# Altium PCB Sterilise.PcbDoc
Units mil, origin at the board's own origin, x right, y up, seen from the top; angles counter-clockwise.
Board outline 1878.4 x 1473.4 mil, 2 copper layers (Top Layer, Bottom Layer); 9 components, 0 nets, 27 pads, 3 vias.
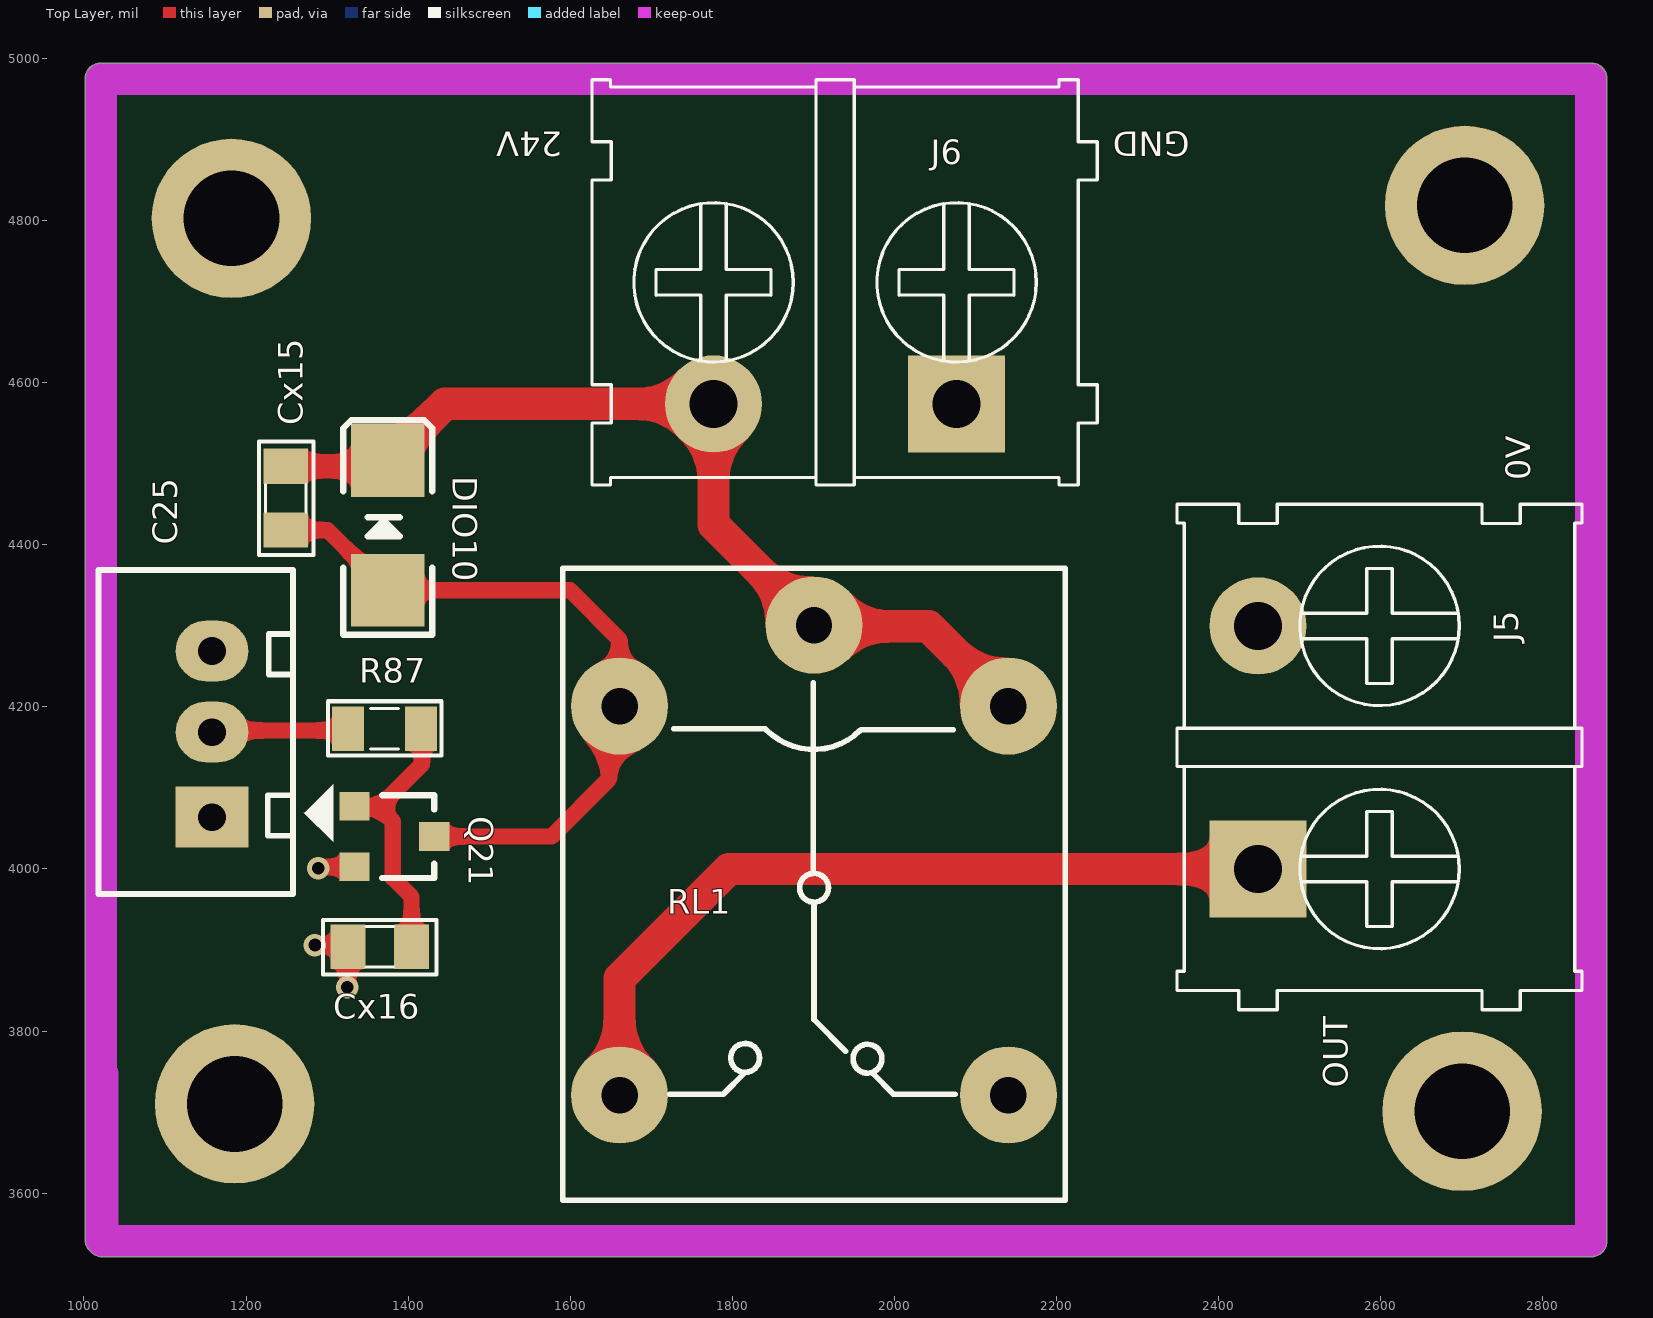
[diagram p0: Top Layer view]
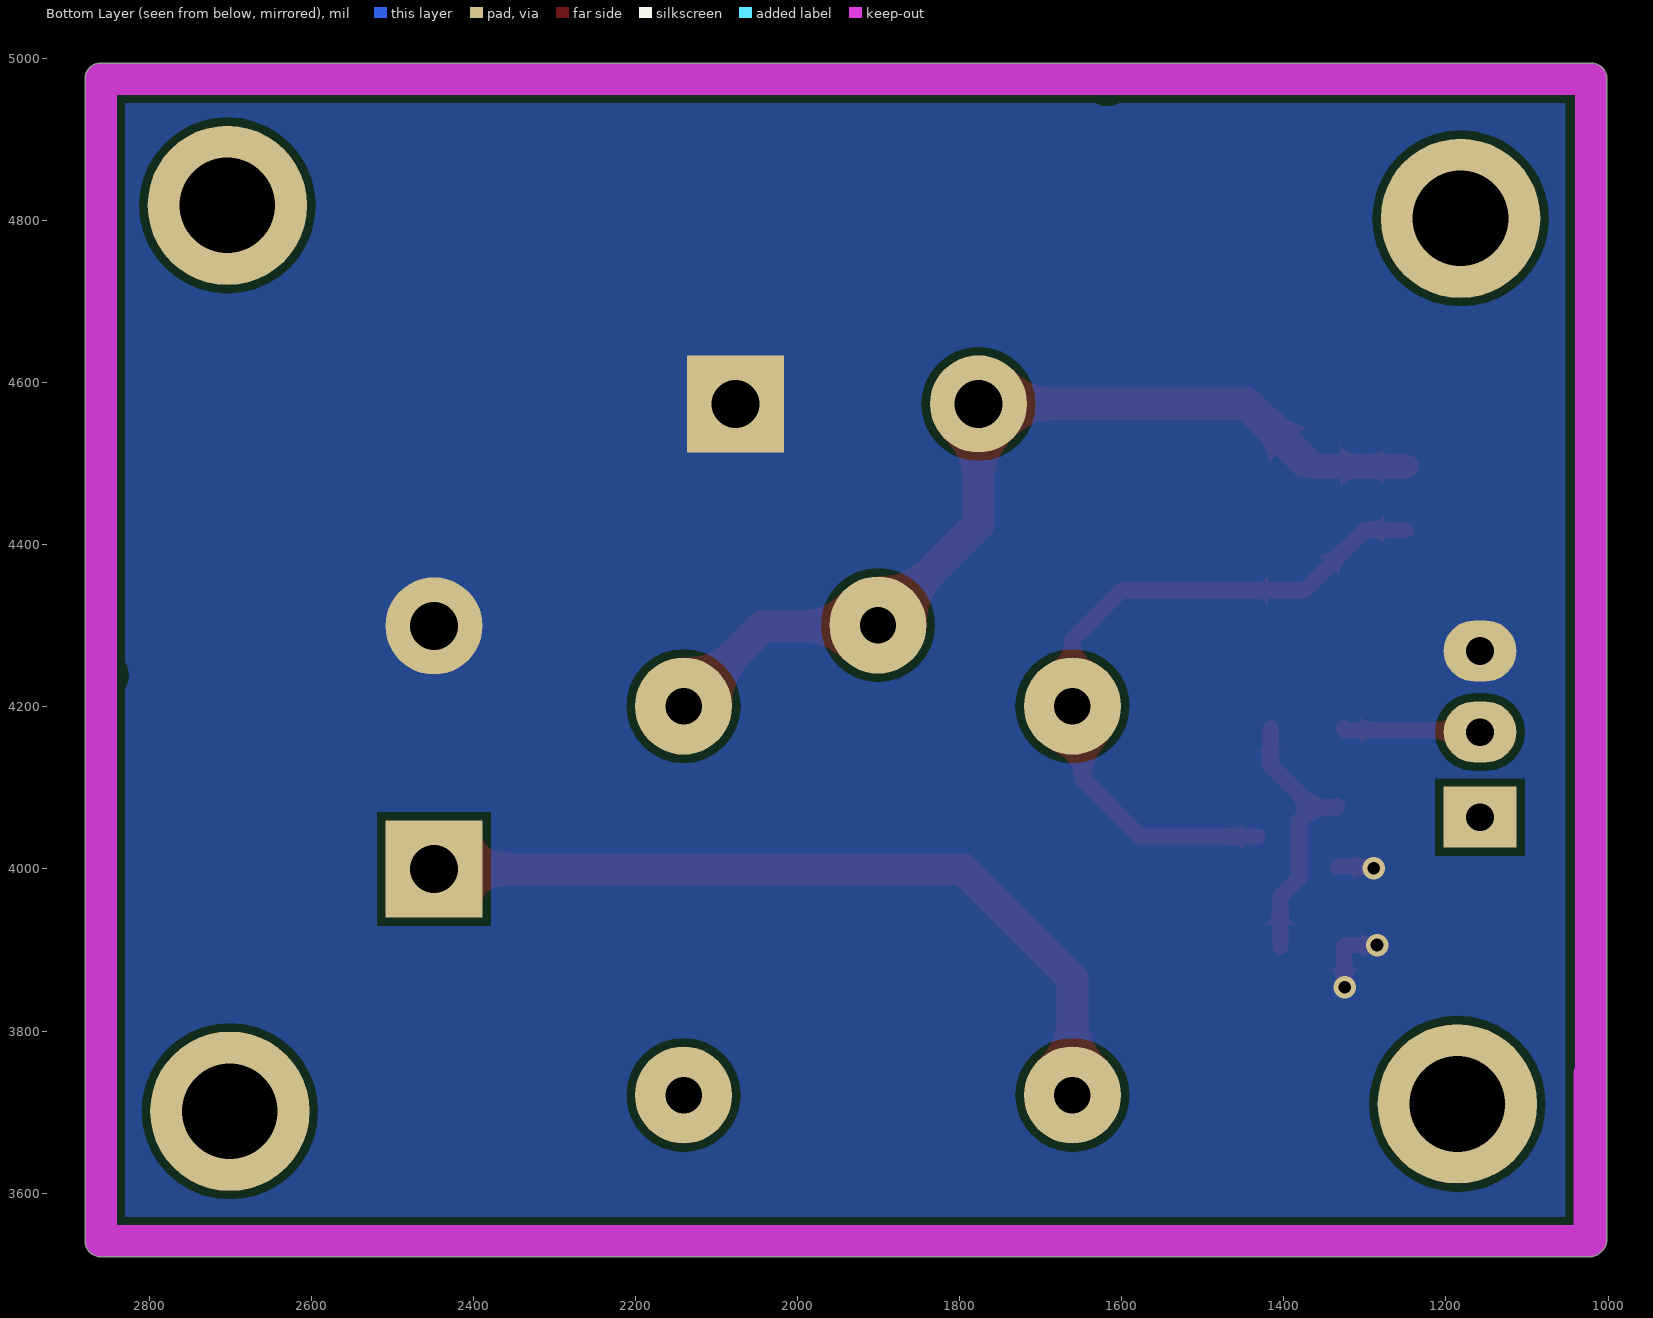
[diagram p1: Bottom Layer view, seen from below]

## Layer stack, top to bottom
Top Solder: solder mask 0.4, Solder Resist, Dk 3.5
Top Layer: signal copper 1.4
Dielectric 1: dielectric 12.6, FR-4, Dk 4.8
Bottom Layer: signal copper 1.4
Bottom Solder: solder mask 0.4, Solder Resist, Dk 3.5

## Board outline
1008.11,3528.11 cw(c1021,3543) 1001.3,3543 1001.3,4975 cw(c1021,4975) 1021,4994.7 2860,4994.7 cw(c2860,4975) 2879.7,4975 2879.7,3541 cw(c2860,3541) 2860,3521.3 1023,3521.3 cw(c1023,3541)

## Design rules (kind name [scope] priority, off if disabled: settings)
Clearance [All] p1: gap=10 ignorepadtopadclearanceinfootprint=FALSE
PlaneConnect [All] p1: planeconnectstyle=Direct reliefexpansion=20 reliefentries=4 reliefconductorwidth=10 reliefairgap=10
PolygonConnect [All] p1: connectstyle=Direct reliefconductorwidth=10 reliefentries=4 polygonreliefangle="90 Angle" airgapwidth=10
RoutingVias [All] p1: holewidth=28 width=50 viastyle="Through Hole" minholewidth=28 minwidth=50 maxholewidth=28 maxwidth=50
SolderMaskExpansion [All] p1: expansion=4 istentingtop=FALSE
Width [All] p1: maxlimit=30 minlimit=10 preferedwidth=20
29 further rules are at their usual default settings.

## Components (designator, comment, footprint, x,y, rotation, side; value= is the part's Value field where it differs from the comment)
C25 "Header3" Header3 1158,4069 r90 top
Cx15 "104" CN-SMD-0805 1249.01,4457.63 r90 top value=33pF
Cx16 "104" CN-SMD-0805 1365,3904 r0 top value=33pF
DIO10 "Diode SMD" DIO-SMD-106 1375,4424 r270 top value=1N5007
J5 "KF2" KF2-7.62 2599,4150 r90 top
J6 "KF2" KF2-7.62 1927,4724 r180 top
Q21 "2SC1815" SOT23-321 1383,4040 r270 top value=C1815
R87 "470" RES-SMD-0805 1371,4173 r180 top
RL1 "Relay 10A/12V" "RELAY 5" 1901,3976 r270 top value="Relay SPDT, 10A, 12V"

## Footprints (in the part's own frame and the unit in brackets; to place one, negate y for a bottom-side part, rotate by r counter-clockwise, add the part's x,y. Pads: shape width x height; smd on the part's side, far side on the other; paste and mask are expansions set on the pad)
CN-SMD-0805 [mil]
  rect 43.31x55 smd paste+0 mask-55: 1(-39.36,0.01) 2(39.37,0.01)
  silkscreen extent -70,-34 70,33, body extent -39,-25 39,25, height 31
DIO-SMD-106 [mil]
  rect 90x90.55 smd paste+0 mask-90.55: 1(80,0) 2(-80,0)
  silkscreen extent -130,-55 135,55, body extent -99,-50 106,52, height 95
Header3 [mil] "CON 3"
  rect 75x90 hole 34 paste+0 mask-90: 1(-5,0)
  oval 75x90 hole 34 paste+0 mask-90: 2(100,0) 3(200,0)
  silkscreen extent -100,-150 300,140, body extent -95,-90 295,136, height 276
KF2-7.62 [mil]
  rect 120x120 hole 59.06 paste+0 mask-120: 1(-150,150)
  round 120 hole 59.06 paste+0 mask-120: 2(150,150)
  silkscreen extent -324,-250 300,250, body extent -300,-241 300,231, height 337
"RELAY 5" [mil] "Reley DPDT, 8 pin, 1A, W400mil, L800mil,H 300mil"
  round 120 hole 45 paste+0 mask-120: 1(-325,0) 2(255,240) 3(255,-240) 4(-225,-240) 5(-225,240)
  silkscreen extent -395,-310 385,310, body extent -371,-304 381,306, height 602
RES-SMD-0805 [mil]
  rect 39.37x55 smd paste+0 mask-55: 1(-45,0) 2(45,0)
  silkscreen extent -70,-34 70,33, body extent -39,-25 39,25, height 31
SOT23-321 [mm]
  rect 0.9x0.95 smd mask+0: 1(0.95,-1.25)
  rect 0.9x0.95 smd: 2(0,1.25) 3(-0.95,-1.25)
  silkscreen extent -1.3,-0.38 1.3,1.25, body extent -1.52,-1.23 1.48,1.27, height 1.06

## Part data
C25: "Header IDC, 3 x 1 Pin Vertical 2.54mm Pitch (Non-Boxed, Male)", Manufacturer="W¨¹rth Elektronik eiSos GmbH", partNo=613002143121, ComponentLink1 Description=Manufacturer, ComponentLink1URL=http://www.we-online.com, ComponentLink2 Description=Datasheet, ComponentLink2URL=http://katalog.we-online.de/em/datasheet/6130xx143121.pdf, Created by="Karrer Zheng", Created Date="29 March 2013", NoPins=02
Cx15 Cx16: library part CN
DIO10: "Default Diode", Code - JEDEC=DO-214-AB, Published=8-Jun-2000, Publisher="Altium Limited", Revision="July-2002: Re-released for DXP Platform."
J5 J6: Manufacturer="Würth Elektronik eiSos GmbH", partNo=691103110002, ComponentLink1 Description=Manufacturer, ComponentLink1URL=http://www.we-online.com, ComponentLink2 Description=Datasheet, ComponentLink2URL=http://katalog.we-online.de/em/datasheet/6911031100xx.pdf, Created by="Karrer Zheng", Created Date="29 October 2013", NoPins=2
Q21: "NPN 600mW, ECB"
R87: library part Res-SMD, "Resistor", Manufacturer="Generic Components", Class=Passive, Published=08/06/2000, Publisher="Altium Hobart Technology Centre"
RL1: library part "Relay 5", "Relay SPDT,10A - 12VDC 5 Pin"

## Free pads (board coordinates)
  round 196.85 hole 118.11 paste+0 mask+0: 2(1182,4803) 2(1186,3710) 2(2701,3701) 2(2704,4819)

## Via types
v1: diameter 27.56, hole 15.75, Top Layer to Bottom Layer, 3 vias

## Nets (pads, with @x,y where several pads share a name; then routed paths per layer and width w, separated by ;. In a path a pad name is that pad's centre, name@x,y a point inside that pad or via, vN(x,y) a via of type N, cw(c..) or ccw(c..) an arc to the next point about the centre after c; other vN are vias at no path point)
pads on no net: C25.1 C25.2 C25.3 Cx15.1 Cx15.2 Cx16.1 Cx16.2 DIO10.1 DIO10.2 J5.1 J5.2 J6.1 J6.2 Q21.1 Q21.2 Q21.3 R87.1 R87.2 RL1.1 RL1.2 RL1.3 RL1.4 RL1.5
copper on no net: | length 3690.1
  Top Layer w20: 1158,4169 1160,4171 1324,4171 1326,4173 ; 1249,4418.26 1300.74,4418.26 1339.72,4379.28 1339.72,4379 1374.72,4344 1375,4344 1600,4344 1661,4283 1661,4201 1648,4188 1648,4111 1577,4040 1432.21,4040 ; v1(1285,3906) 1323.64,3906 1325.64,3904.01 1325.64,3854.64 v1(1325,3854) ; v1(1289,4001) 1290.6,4002.6 1333.79,4002.6 ; 1333.79,4077.4 1335.19,4076 1364,4076 ; 1404.37,3904.01 1404.37,3965.57 1381,3988.94 1381,4059 1364,4076 ; 1416,4173 1417,4172 1417,4129 1364,4076
  Top Layer w30: 1249,4497 1368,4497 1375,4504
  Top Layer w40: 1375,4504 1375.28,4504 1445.28,4574 1777,4574 1777,4425 1901,4301 1902.65,4299.35 2042.65,4299.35 2141,4201 ; 1661,3721 1661,3865 1796,4000 2449,4000

## Polygon pours and split planes (outlines as drawn)
no net on Bottom Layer "NONET_L02_P000" (solid, remove dead copper, pour order 0): 1043,4955 2840,4955 2840,3561 1043,3561

## Keep-outs
Keep-Out Layer:
  lines w39.37: 1021,3543 1021,4975 2860,4975 2860,3541 1023,3541 1023,3747

## Silkscreen, mask and mechanical layers (free items; w line width, h text height)
Top Overlay:
  text "24V" at 1590,4910 h30 r180
  text "GND" at 2365,4910 h30 r180
  text "0V" at 2785,4480 h30 r90
  text "OUT" at 2560,3730 h30 r90